# EAGLE board MBW1 (EAGLE 5.06)
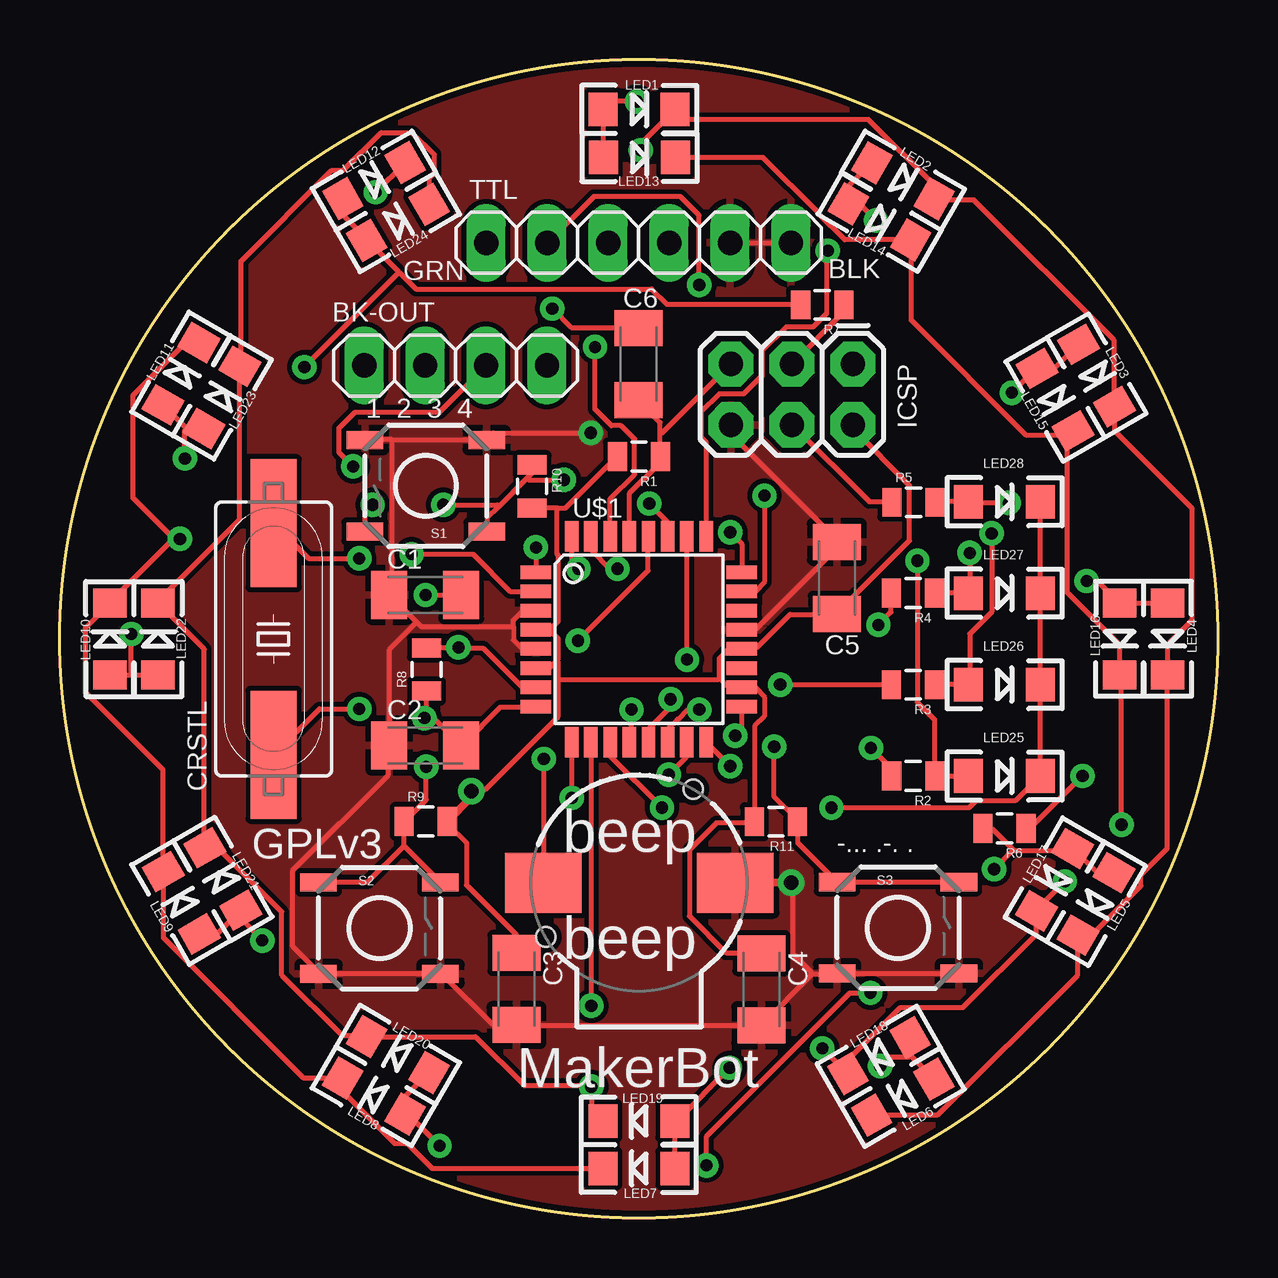
[diagram p0: board, top side]
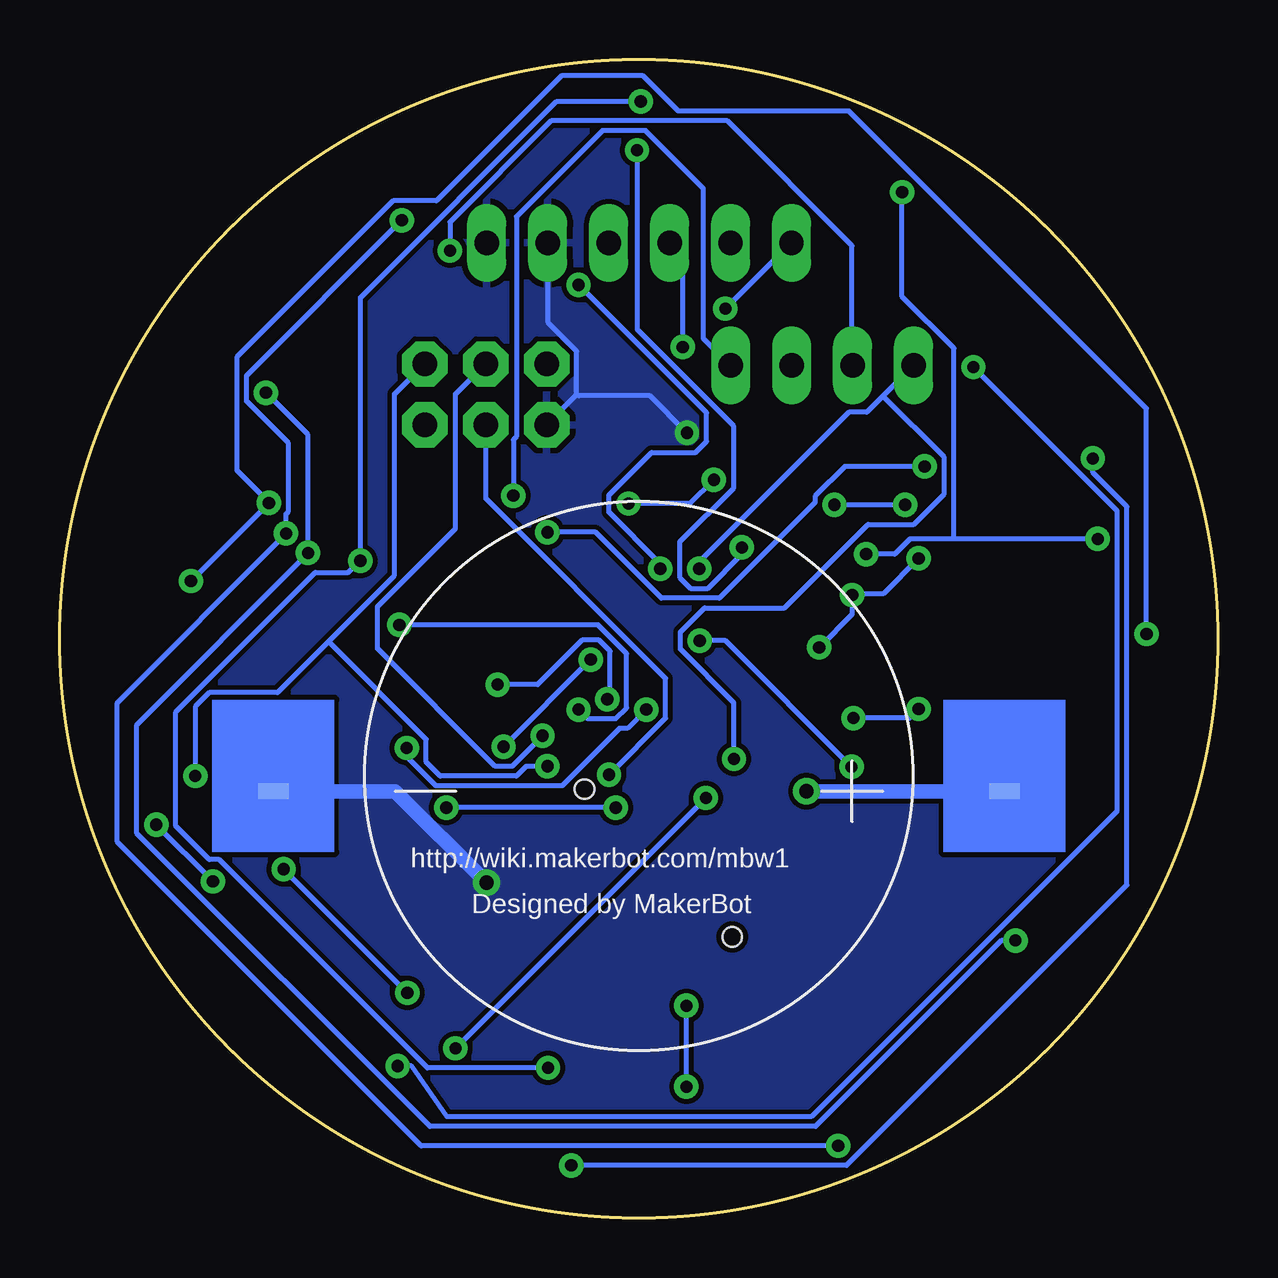
[diagram p1: board, bottom side, seen from below]

Size 48.26 x 48.26 mm. Coordinates in mm from the lower left corner, seen from the top.
Outline: circle at 24.13,24.13 radius 24.13
Copper layers (1*16): Top 0.035mm / dielectric 1.5mm / Bottom 0.035mm
Design rules "SparkFun2": minimum track width 8mil, minimum drill 20mil, track to track 8mil, track to pad 8mil, pad to pad 8mil, via to via 8mil, smd to smd 8mil, copper to edge 10mil, drill to drill 8mil, minimum pad ring 12mil, minimum via ring 10mil, stop-mask expansion 4mil, vias tented up to drill 25mil, thermal gap 10mil

## Footprints (pad centres in the part's own frame; a part is rotated, then mirrored left to right if it is on the bottom)
1X04 = drill 1.016 long: 1 -3.81,0; 2 -1.27,0; 3 1.27,0; 4 3.81,0
C1206K = smd 1.5 x 2: 1 -1.5,0; 2 1.5,0
HC49UP = smd 5.334 x 1.93: 1 -4.826,0; 2 4.826,0
2X3 = drill 1.016 pad 1.88 octagon: 1 0,0; 2 0,2.54; 3 2.54,0; 4 2.54,2.54; 5 5.08,0; 6 5.08,2.54
LED-1206 = smd 1.2 x 1.4: A -1.5,0; C 1.5,0
0805 = smd 0.8 x 1.2: 1 -0.9,0; 2 0.9,0
TACTILE_SWITCH_SMD = smd 1.524 x 0.762: 1 -2.54,1.905; 2 2.54,1.905; 3 -2.54,-1.905; 4 2.54,-1.905
BUZZER-CCV = smd 3.2 x 2.5: + 4,0; - -4,0 | hole 0.8: -3.9,-2.25; 2.25,3.9
1X06 = drill 1.016 long: 1 -6.35,0; 2 -3.81,0; 3 -1.27,0; 4 1.27,0; 5 3.81,0; 6 6.35,0
TQFP32-08 = smd 1.27 x 0.559: 1 -4.293,2.8; 2 -4.293,2; 3 -4.293,1.2; 4 -4.293,0.4; 5 -4.293,-0.4; 6 -4.293,-1.2; 7 -4.293,-2; 8 -4.293,-2.8; 17 4.293,-2.8; 18 4.293,-2; 19 4.293,-1.2; 20 4.293,-0.4; 21 4.293,0.4; 22 4.293,1.2; 23 4.293,2; 24 4.293,2.8 | smd 0.559 x 1.27: 9 -2.8,-4.293; 10 -2,-4.293; 11 -1.2,-4.293; 12 -0.4,-4.293; 13 0.4,-4.293; 14 1.2,-4.293; 15 2,-4.293; 16 2.8,-4.293; 25 2.8,4.293; 26 2,4.293; 27 1.2,4.293; 28 0.4,4.293; 29 -0.4,4.293; 30 -1.2,4.293; 31 -2,4.293; 32 -2.8,4.293
AGAIN = smd 1.27 x 0.635: + -15.24,0; - 15.24,0

## Placement (x,y rotation side)
BK-OUT  [1X04]  16.49,35.53 0 top
C1  [C1206K]  15.23,25.96 0 top
C2  [C1206K]  15.23,19.68 0 top
C3  [C1206K]  19.02,9.54 270 top
C4  [C1206K]  29.24,9.53 270 top
C5  [C1206K]  32.38,26.67 90 top
C6  [C1206K]  24.1,35.59 90 top
CRSTL  [HC49UP]  8.9,24.12 90 top
ICSP  AVR_SPI_PRG_6PTH  [2X3]  33.05,35.59 180 top
LED1  [LED-1206]  24.14,46.2 0 top
LED2  [LED-1206]  35.14,43.23 330 top
LED3  [LED-1206]  43.21,35.11 300 top
LED4  [LED-1206]  46.17,24.13 270 top
LED5  [LED-1206]  43.19,13.08 240 top
LED6  [LED-1206]  35.13,5.02 210 top
LED7  [LED-1206]  24.13,2.06 180 top
LED8  [LED-1206]  13.08,5.07 150 top
LED9  [LED-1206]  5.05,13.13 120 top
LED10  [LED-1206]  2.08,24.13 90 top
LED11  [LED-1206]  5.05,35.18 60 top
LED12  [LED-1206]  13.09,43.23 30 top
LED13  [LED-1206]  24.16,44.2 0 top
LED14  [LED-1206]  34.16,41.51 330 top
LED15  [LED-1206]  41.48,34.1 300 top
LED16  [LED-1206]  44.17,24.13 270 top
LED17  [LED-1206]  41.45,14.09 240 top
LED18  [LED-1206]  34.14,6.76 210 top
LED19  [LED-1206]  24.13,4.04 180 top
LED20  [LED-1206]  14.08,6.8 150 top
LED21  [LED-1206]  6.78,14.12 120 top
LED22  [LED-1206]  4.09,24.13 90 top
LED23  [LED-1206]  6.75,34.2 60 top
LED24  [LED-1206]  14.08,41.49 30 top
LED25  [LED-1206]  39.37,18.41 0 top
LED26  [LED-1206]  39.37,22.23 0 top
LED27  [LED-1206]  39.37,26.04 0 top
LED28  [LED-1206]  39.37,29.84 0 top
R1  [0805]  24.14,31.72 180 top
R2  [0805]  35.57,18.42 180 top
R3  [0805]  35.56,22.22 180 top
R4  [0805]  35.56,26.04 180 top
R5  [0805]  35.58,29.82 0 top
R6  [0805]  39.37,16.23 180 top
R7  [0805]  31.78,38.05 180 top
R8  [0805]  15.28,22.86 90 top
R9  [0805]  15.25,16.52 0 top
R10  [0805]  19.68,30.48 270 top
R11  [0805]  29.84,16.51 180 top
S1  [TACTILE_SWITCH_SMD]  15.25,30.51 180 top
S2  [TACTILE_SWITCH_SMD]  13.32,12.07 0 top
S3  [TACTILE_SWITCH_SMD]  34.93,12.09 0 top
SG1  BUZZERSMD2  [BUZZER-CCV]  24.14,13.96 0 top
TTL  [1X06]  24.12,40.64 0 top
U$1  [TQFP32-08]  24.13,24.11 0 top
U$3  AGAAIN  [AGAIN]  24.13,17.78 180 bottom

## Library data of the parts
BK-OUT TTL = pinhead
C1-C6 = rcl
CRSTL ICSP LED1-LED28 R1-R11 S1-S3 SG1 = sparkFun
U$1 = atmega8
U$3 = bre

## Nets
3.3V: C3.1 C4.1 C5.1 ICSP.2 R1.2 R9.2 R10.2 R11.2 U$1.4 U$1.6 U$1.18 U$1.20 U$3.+
ADC6: U$1.19
ADC7: U$1.22
C0: BK-OUT.4 U$1.23
C1: BK-OUT.3 U$1.24
C2: BK-OUT.2 U$1.25
COL0: LED1.C LED2.C LED3.C LED4.C LED5.C LED6.C U$1.1
COL1: LED7.C LED8.C LED9.C LED10.C LED11.C LED12.C U$1.2
COL2: LED13.C LED14.C LED15.C LED16.C LED17.C LED18.C U$1.9
COL3: LED19.C LED20.C LED21.C LED22.C LED23.C LED24.C U$1.10
COL4: LED25.C LED26.C LED27.C LED28.C U$1.11
D2: BK-OUT.1 SG1.- U$1.32
GND: C1.1 C2.1 C3.2 C4.2 C5.2 ICSP.6 S1.3 S1.4 S2.3 S2.4 S3.3 S3.4 SG1.+ TTL.5 TTL.6 U$1.3 U$1.5 U$1.21 U$3.-
MISO: ICSP.1 R6.1 U$1.16
MOSI: ICSP.4 R5.1 U$1.15
N$1: R2.2 U$1.12
N$2: R3.2 U$1.13
N$3: R4.2 U$1.14
N$5: C1.2 CRSTL.2 R8.2 U$1.7
N$8: R9.1 S2.1 S2.2 U$1.28
N$9: R10.1 S1.1 S1.2 U$1.27
N$10: R11.1 S3.1 S3.2 U$1.26
N$12: C6.2 TTL.1
N$23: C2.2 CRSTL.1 R8.1 U$1.8
PD0: TTL.3 U$1.30
PD1: TTL.2 U$1.31
RESET: C6.1 ICSP.5 R1.1 U$1.29
ROW0: LED1.A LED7.A LED13.A LED19.A LED25.A R2.1
ROW1: LED2.A LED8.A LED14.A LED20.A LED26.A R3.1
ROW2: LED3.A LED9.A LED15.A LED21.A LED27.A R4.1
ROW3: LED4.A LED10.A LED16.A LED22.A LED28.A R5.2
ROW4: LED5.A LED11.A LED17.A LED23.A R6.2
ROW5: LED6.A LED12.A LED18.A LED24.A R7.2
SCK: ICSP.3 R7.1 U$1.17

## Tracks (layer width: path | path; a pad name or v marks a point on that pad's centre or on a via)
3.3V  (via drill 0.6)
  Top 0.203: C3.1 19.02,11.79 16.94,13.87 16.94,15.65 16.2,16.38 R9.2 | 20.71,23.23 20.78,23.29 20.78,24.13 20.42,24.49 | 20.71,23.23 20.4,22.91 U$1.6 | 20.42,24.49 19.84,24.49 U$1.4 | 20.73,29.59 21.08,29.59 23.22,31.73 R1.2 | 20.73,29.59 19.68,29.59 R10.2 | 20.42,24.49 20.47,24.56 20.78,24.87 20.78,27.61 20.73,27.66 20.73,29.59 | 20.78,22.43 20.78,23.16 20.71,23.23 | 20.78,22.43 20.78,20.9 17.73,17.86 17.27,17.86 v17.14,17.78 | 27.48,22.48 27.48,23.32 27.86,23.7 28.42,23.7 U$1.20 28.5,23.77 29.06,23.77 30.43,25.15 32.38,25.15 C5.1 32.44,25.25 35.41,28.22 35.41,30.53 33.07,32.87 33.07,33.05 ICSP.2 | 27.48,22.48 27.79,22.17 28.35,22.17 U$1.18 28.42,22.1 28.98,22.1 29.36,21.72 29.36,20.9 28.96,20.5 28.96,16.54 R11.2 28.85,16.46 27.36,16.46 26.24,15.34 26.24,12.57 27.76,11.05 29.23,11.05 C4.1 | 20.78,22.43 27.41,22.43 27.48,22.48
  Top 0.305: v17.14,17.78 17.14,17.52 R9.2
  Bottom 0.61: U$3.+ v17.14,17.78
C0  (via drill 0.51)
  Top 0.203: v29.36,30.1 29.36,26.49 28.98,26.11 U$1.23
  Bottom 0.203: v29.36,30.1 29.36,32.44 29.23,32.56 29.23,41.73 25.65,45.31 23.85,45.31 21.44,42.9 21.44,36.65 20.32,35.53 BK-OUT.4
C1  (via drill 0.51)
  Top 0.203: v27.94,28.57 28.42,28.09 U$1.24 | v12.22,31.32 11.63,31.9 11.63,32.92 12.29,33.58 15.82,33.58 17.75,35.51 BK-OUT.3
  Bottom 0.203: v27.94,28.57 25.93,28.57 23.19,25.83 20.78,25.83 16.79,29.82 16.79,30.07 15.54,31.32 v12.22,31.32
C2  (via drill 0.51)
  Top 0.203: v32,40.31 31.95,40.26 31.95,37.69 31.39,37.13 30.28,37.13 29.26,36.12 29.26,35.1 28.5,34.34 27.48,34.34 26.72,33.58 26.72,32.54 26.92,32.33 26.92,28.42 U$1.25
  Bottom 0.203: v32,40.31 32,41.5 27.79,45.72 20.45,45.72 15.24,40.51 15.24,35.53 BK-OUT.2
COL0  (via drill 0.51)
  Top 0.203: LED6.C 33.83,4.29 36.6,4.29 42.42,10.11 42.42,11.76 LED5.C 42.49,11.28 45.06,13.84 45.06,14.3 46.15,15.39 46.15,22.61 LED4.C 46.18,22.73 46.18,23.9 47.19,24.92 47.19,29.57 43.97,32.79 43.97,33.71 LED3.C 43.94,33.83 43.94,36.58 38.1,42.42 36.52,42.42 LED2.C 36.42,42.49 36.42,43.05 33.71,45.77 25.35,45.77 LED1.C 25.63,46.18 24.21,44.76 v24.21,44.5 | v19.84,27.94 U$1.1
  Bottom 0.203: v19.84,27.94 19.84,27.66 21.26,26.24 21.97,26.24 22.43,26.7 22.43,28.17 20.19,30.4 20.19,33.02 24.21,37.03 v24.21,44.5
COL1  (via drill 0.51)
  Top 0.203: LED7.C 15.52,2.06 14.48,3.1 13.95,3.1 11.28,5.77 LED8.C 11.76,5.84 10.13,5.84 4.32,11.66 4.32,14.43 LED9.C 4.29,14.53 4.29,18.67 1.07,21.89 1.07,24.59 2.03,25.55 LED10.C 2.08,25.65 4.72,28.3 v5,28.3 4.67,28.37 3.05,30 3.05,34.29 5.23,36.47 LED11.C | v14.66,27.66 17.22,27.66 18.77,26.11 U$1.2 | v13.16,42.75 14.38,43.97 LED12.C
  Bottom 0.203: v14.66,27.66 13.46,27.66 12.83,28.3 11,28.3 | v5,28.3 11,28.3 | v13.16,42.75 13.16,38.41 11,36.25 11,28.3
COL2  (via drill 0.51)
  Top 0.203: v21.34,17.5 U$1.9 | v31.77,7.06 32.82,6.02 LED18.C 32.61,6.35 35.03,8.76 37.64,8.76 40.69,11.81 40.69,12.78 LED17.C 40.74,12.88 v41.88,14.02 | LED13.C 29.31,44.2 31.6,41.91 31.6,41.88 32.72,40.77 LED14.C 35.48,40.66 35.48,37.41 40.28,32.61 41.91,32.61 LED15.C 42.22,32.79 41.99,32.56 41.99,26.06 44.17,23.88 LED16.C 44.25,22.58 v44.25,16.38
  Bottom 0.203: v31.77,7.06 v21.34,17.5 | v41.88,14.02 v44.25,16.38
COL3  (via drill 0.51)
  Top 0.203: v22.15,8.84 22.15,19.81 U$1.10 | LED19.C 22.61,4.04 22.15,4.5 v22.15,5.46 22.07,5.51 19.36,5.51 17.32,7.54 12.8,7.54 LED20.C 12.7,7.59 11.76,7.59 9.25,10.11 9.25,12.75 6.1,15.9 LED21.C 6.02,15.44 6.02,23.7 LED22.C 4.12,25.73 7.49,29.11 LED23.C 7.54,35.59 7.54,39.88 11.33,43.66 11.81,43.66 13.39,45.24 14.68,45.24 15.6,44.32 15.6,43.54 15.39,43.33 15.39,42.27 LED24.C
  Bottom 0.203: v22.15,5.46 v22.15,8.84
COL4  (via drill 0.51)
  Top 0.203: v25.09,17.09 22.94,19.25 U$1.11 | v32.16,17.09 37.9,17.09 38.2,17.4 39.85,17.4 LED25.C 40.87,18.49 LED26.C 40.87,22.3 LED27.C 40.87,26.11 LED28.C
  Bottom 0.203: v25.09,17.09 v32.16,17.09
D2  (via drill 0.51)
  Top 0.203: v21.61,27.05 21.34,27.33 U$1.32 | v20.17,19.13 20.17,13.97 SG1.-
  Bottom 0.203: v21.61,27.05 21.61,27.33 15.37,33.58 14.63,33.58 13.96,34.25 | 13.96,34.25 12.7,35.51 BK-OUT.1 | v20.17,19.13 20.17,21.46 22.4,23.7 22.4,24.41 21.39,25.43 18.06,25.43 14.58,28.91 12.68,28.91 11.4,30.18 11.4,31.7 13.96,34.25
GND  (via drill 0.51, 0.6)
  Top 0.203: TTL.5 TTL.6 | U$1.21 28.98,24.51 32.38,27.91 C5.2 32.36,28.27 27.99,32.64 27.99,33.05 ICSP.6 | 13.84,32.44 17.78,32.44 S1.3 17.86,32.51 18.06,32.72 v22.12,32.72 | 13.84,32.44 12.72,32.44 S1.4 | 18.9,24.64 18.9,24.92 19.28,25.3 19.84,25.3 U$1.3 | 18.9,24.64 18.9,24.08 19.25,23.72 19.84,23.72 U$1.5 | 14.87,24.83 C1.1 13.84,25.98 13.84,32.44 | 14.87,24.83 15.06,24.64 18.9,24.64 | 14.87,24.83 13.74,23.7 C2.1 13.69,19.58 13.69,18.47 9.7,14.48 9.7,11.3 10.74,10.26 S2.3 10.79,10.19 15.85,10.19 S2.4 15.95,10.13 18.03,8.05 19.02,8.05 C3.2 19.13,8.03 29.16,8.03 C4.2 31.37,10.16 | 31.37,10.16 32.38,10.16 S3.3 32.49,10.19 S3.4 | v30.48,13.97 30.56,13.84 30.56,11 31.32,10.24 31.37,10.16
  Top 0.305: v30.48,13.97 28.16,13.97 SG1.+
  Bottom 0.203: 26.72,34.31 26.72,36.12 27.91,37.31 27.91,40.64 TTL.5 | 26.72,34.31 27.96,33.07 ICSP.6 | v22.12,32.72 23.67,34.27 26.64,34.27 26.72,34.31
  Bottom 0.61: U$3.- 34.29,17.78 v30.48,13.97
  pour Top: -1.27,49.53 49.53,49.53 49.53,-0.64 -1.27,-0.64
  pour Bottom: -1.91,50.16 50.8,50.16 50.8,-1.27 -1.91,-1.27
MISO  (via drill 0.51)
  Top 0.203: v42.62,18.41 40.44,16.23 40.28,16.23 R6.1 | v27.94,18.82 26.95,19.81 U$1.16
  Bottom 0.203: v42.62,18.41 42.62,21.31 42.04,21.89 39.19,21.89 37.07,24.02 | 37.07,24.02 34.31,26.77 34.31,34.34 33.07,35.59 ICSP.1 | v27.94,18.82 28.83,18.82 29.23,18.41 32.41,18.41 32.99,19 32.99,19.94 37.07,24.02
MOSI  (via drill 0.51)
  Top 0.203: R5.1 34.67,29.84 33.73,29.84 30.53,33.05 ICSP.4 | v25.38,18.47 26.11,19.2 26.11,19.81 U$1.15
  Bottom 0.203: v25.38,18.47 23.01,20.83 23.01,22.48 30.5,29.97 ICSP.4
N$1  (via drill 0.51)
  Top 0.203: v33.81,19.58 34.65,18.75 34.65,18.44 R2.2 | v23.82,21.18 23.82,19.91 23.75,19.84 U$1.12
  Bottom 0.203: v33.81,19.58 33.81,19.23 32.59,18.01 27.33,18.01 24.94,20.4 24.61,20.4 v23.82,21.18
N$2  (via drill 0.51)
  Top 0.203: v30.02,22.23 34.65,22.23 R3.2 | v25.45,21.61 25.45,21.29 24.54,20.37 24.54,19.84 U$1.13
  Bottom 0.203: v30.02,22.23 28.35,22.23 26.49,24.08 25.78,24.08 25.32,23.62 25.32,21.74 v25.45,21.61
N$3  (via drill 0.51)
  Top 0.203: v34.11,24.71 34.65,25.25 34.65,26.04 R4.2 | v26.64,21.18 26.19,21.18 25.78,20.78 25.73,20.78 25.35,20.4 25.35,19.84 U$1.14
  Bottom 0.203: v34.11,24.71 25.83,24.71 24.64,23.52 24.64,21.26 25.09,20.8 26.26,20.8 v26.64,21.18
N$5  (via drill 0.51)
  Top 0.203: 16.61,23.75 17.63,23.75 19.25,22.12 19.84,22.12 U$1.7 | 16.61,23.75 15.29,23.75 R8.2 | v15.24,25.96 16.71,25.96 C1.2 | v16.61,23.77 16.61,23.75 | v12.47,27.48 10.36,27.48 8.91,28.93 CRSTL.2
  Bottom 0.203: v16.61,23.77 15.24,25.15 v15.24,25.96 15.16,26.01 13.95,26.01 v12.47,27.48
N$8  (via drill 0.51)
  Top 0.203: 14.35,15.49 R9.1 14.43,16.59 15.27,17.42 v15.27,18.8 | 14.35,15.49 15.85,13.99 S2.2 | v21.59,24.05 24.51,26.98 24.51,28.4 U$1.28 | S2.1 10.79,13.99 12.83,13.99 14.28,15.44 14.35,15.49
  Bottom 0.203: v21.59,24.05 20.52,24.05 v15.27,18.8
N$9  (via drill 0.51)
  Top 0.203: 18.3,29.65 17.8,29.16 17.8,28.63 S1.1 | 18.3,29.65 19.47,30.82 | 19.47,30.82 19.66,31.01 19.66,31.37 R10.1 | v24.56,29.77 25.32,29.01 25.32,28.42 U$1.27 | v21.01,30.76 19.53,30.76 19.47,30.82 | v13.03,29.72 12.72,29.41 12.72,28.63 S1.2 | v15.98,29.72 18.24,29.72 18.3,29.65
  Bottom 0.203: v24.56,29.77 22,29.77 v21.01,30.76 | v13.03,29.72 v15.98,29.72
N$10  (via drill 0.51)
  Top 0.203: v26.14,23.27 U$1.26 | v29.77,19.63 29.77,17.55 30.71,16.61 R11.1 30.76,16.51 30.76,15.62 S3.1 32.49,13.99 S3.2
  Bottom 0.203: v29.77,19.63 v26.14,23.27
N$12  (via drill 0.51)
  Top 0.203: v20.52,37.9 21.31,37.11 24.11,37.11 C6.2
  Bottom 0.203: v20.52,37.9 TTL.1
N$23  (via drill 0.51)
  Top 0.203: 15.38,21.02 16.71,19.68 C2.2 16.82,19.74 18.36,21.29 19.84,21.29 U$1.8 | 15.38,21.02 15.29,21.11 15.29,21.95 R8.1 | v12.47,21.21 10.82,21.21 8.91,19.3 CRSTL.1 | v15.19,20.83 15.38,21.02
  Bottom 0.203: v15.19,20.83 12.85,20.83 v12.47,21.21
PD0  (via drill 0.51)
  Top 0.203: v22.3,36.3 22.3,33.71 22.99,33.02 23.39,33.02 23.95,32.46 23.95,30.99 22.94,29.97 22.94,28.42 U$1.30
  Bottom 0.203: v22.3,36.3 22.3,40.11 22.84,40.64 TTL.3
PD1  (via drill 0.51)
  Top 0.203: v23.24,27.05 22.91,27.05 22.15,27.81 22.15,28.4 U$1.31 | v26.64,38.89 26.64,41.78 25.86,42.57 22.25,42.57 TTL.2
  Bottom 0.203: v23.24,27.05 23.24,27.28 25.38,29.41 25.38,30.12 23.6,31.9 21.77,31.9 21.31,32.36 21.31,33.55 v26.64,38.89
RESET
  Top 0.203: 25.02,32.72 25.02,33.15 24.11,34.06 C6.1 | 25.02,32.72 25.02,31.73 R1.1 24.97,31.65 24.97,31.42 23.75,30.2 23.75,28.42 U$1.29 | ICSP.5 25.09,32.72 25.02,32.72
ROW0  (via drill 0.51)
  Top 0.203: LED7.A LED19.A 25.73,4.06 v27.91,6.25 | LED25.A R2.1 36.45,18.52 36.45,20.78 35.74,21.49 v35.74,27.38 | LED13.A 22.63,44.2 22.63,46.18 LED1.A 22.71,46.28 22.96,46.53 v24.05,46.53
  Bottom 0.203: v24.05,46.53 27.56,46.53 35.74,38.35 v35.74,27.38 35.81,27.33 36.25,26.9 37.62,26.9 43.43,21.08 43.43,16.33 42.04,14.94 41.63,14.94 32.94,6.25 v27.91,6.25
ROW1  (via drill 0.51)
  Top 0.203: LED20.A 15.37,6.04 14.4,5.08 14.4,4.34 LED8.A 14.5,4.32 v15.82,3 | R3.1 36.47,22.23 LED26.A 37.92,22.3 37.92,24.33 38.84,25.25 v38.84,28.52 | LED2.A 33.83,43.97 32.87,43 LED14.A 32.94,42.65 v34.01,41.58
  Bottom 0.203: v34.01,41.58 40.49,35.1 40.49,34.04 38.73,32.28 38.73,29.44 38.84,29.34 v38.84,28.52 38.89,28.45 45.87,21.46 45.87,15.67 33.2,3 v15.82,3
ROW2  (via drill 0.51)
  Top 0.203: LED9.A 5.82,11.84 6.55,11.84 7.52,12.8 LED21.A 7.42,12.57 v8.43,11.56 | R4.1 36.47,26.04 LED27.A 37.92,26.11 v37.92,27.71 | LED3.A 42.44,36.4 41.45,35.41 40.74,35.41 LED15.A 40.64,35.36 v39.67,34.39
  Bottom 0.203: v39.67,34.39 37.92,32.64 v37.92,27.71 37.97,27.64 45.06,20.55 45.06,16.03 32.84,3.81 16.76,3.81 9.02,11.56 v8.43,11.56
ROW3  (via drill 0.51)
  Top 0.203: 2.97,22.63 LED22.A | 2.97,22.63 LED10.A | R5.2 36.5,29.84 LED28.A 37.95,29.79 v39.55,29.79 | LED4.A 46.15,25.63 LED16.A 44.09,25.68 43.23,26.54 v42.8,26.54 | 2.97,22.63 v2.97,24.33
  Bottom 0.203: v42.8,26.54 v39.55,29.79 39.6,29.87 40.89,31.17 40.89,35.87 34.37,42.39 32.56,42.39 27.36,47.6 23.95,47.6 22.48,46.13 15.37,46.13 2.97,33.73 v2.97,24.33
ROW4  (via drill 0.51)
  Top 0.203: LED11.A 4.32,33.86 5.26,32.92 5.99,32.92 LED23.A 5.21,32.84 v5.21,31.65 | 39.74,15.33 39.75,15.32 42.14,15.32 42.19,15.37 LED17.A 42.29,15.34 43.23,14.4 43.92,14.4 LED5.A | 39.74,15.33 38.86,16.2 38.48,16.2 R6.2 | v26.95,2.18 26.95,3.4 32.92,9.37 v33.78,9.37 | v38.94,14.53 39.74,15.33
  Bottom 0.203: v5.21,31.65 5.21,31.06 3.79,29.64 3.79,13.87 15.47,2.18 v26.95,2.18 | v33.78,9.37 v38.94,14.53
ROW5  (via drill 0.51)
  Top 0.203: LED6.A 36.42,5.79 35.46,6.76 35.46,7.49 LED18.A 35.38,6.71 34.57,6.71 v34.19,6.33 | 14.13,39.41 12.8,40.74 LED24.A 12.75,40.84 11.81,41.78 11.81,42.47 LED12.A | 14.13,39.41 14.83,38.71 24.66,38.71 25.3,38.08 30.86,38.08 R7.2 | v10.19,35.46 14.13,39.41
  Bottom 0.203: v34.19,6.33 33.6,6.33 32.13,4.22 16.94,4.22 4.19,16.97 4.19,29.46 v10.19,35.46
SCK  (via drill 0.51)
  Top 0.203: R7.1 32.66,38.05 32.66,37.74 ICSP.3 | v28.14,20.09 28.42,20.37 U$1.17
  Bottom 0.203: v28.14,20.09 29.41,18.82 30.12,18.82 35.03,23.72 35.03,25.48 31.77,28.73 31.77,34.34 30.53,35.59 ICSP.3

## Text on the board
tPlace: GRN | BLK | 1 2 3 4 | GPLv3 | beep | -... .-. . | beep | MakerBot
bPlace: http://wiki.makerbot.com/mbw1 | Designed by MakerBot